# Altium PCB BTN7960_DRIVER.PcbDoc
Units mil, origin at the board's own origin, x right, y up, seen from the top; angles counter-clockwise.
Board outline 3013 x 3373 mil, 2 copper layers (Top Layer, Bottom Layer); 92 components, 54 nets, 281 pads, 201 vias.
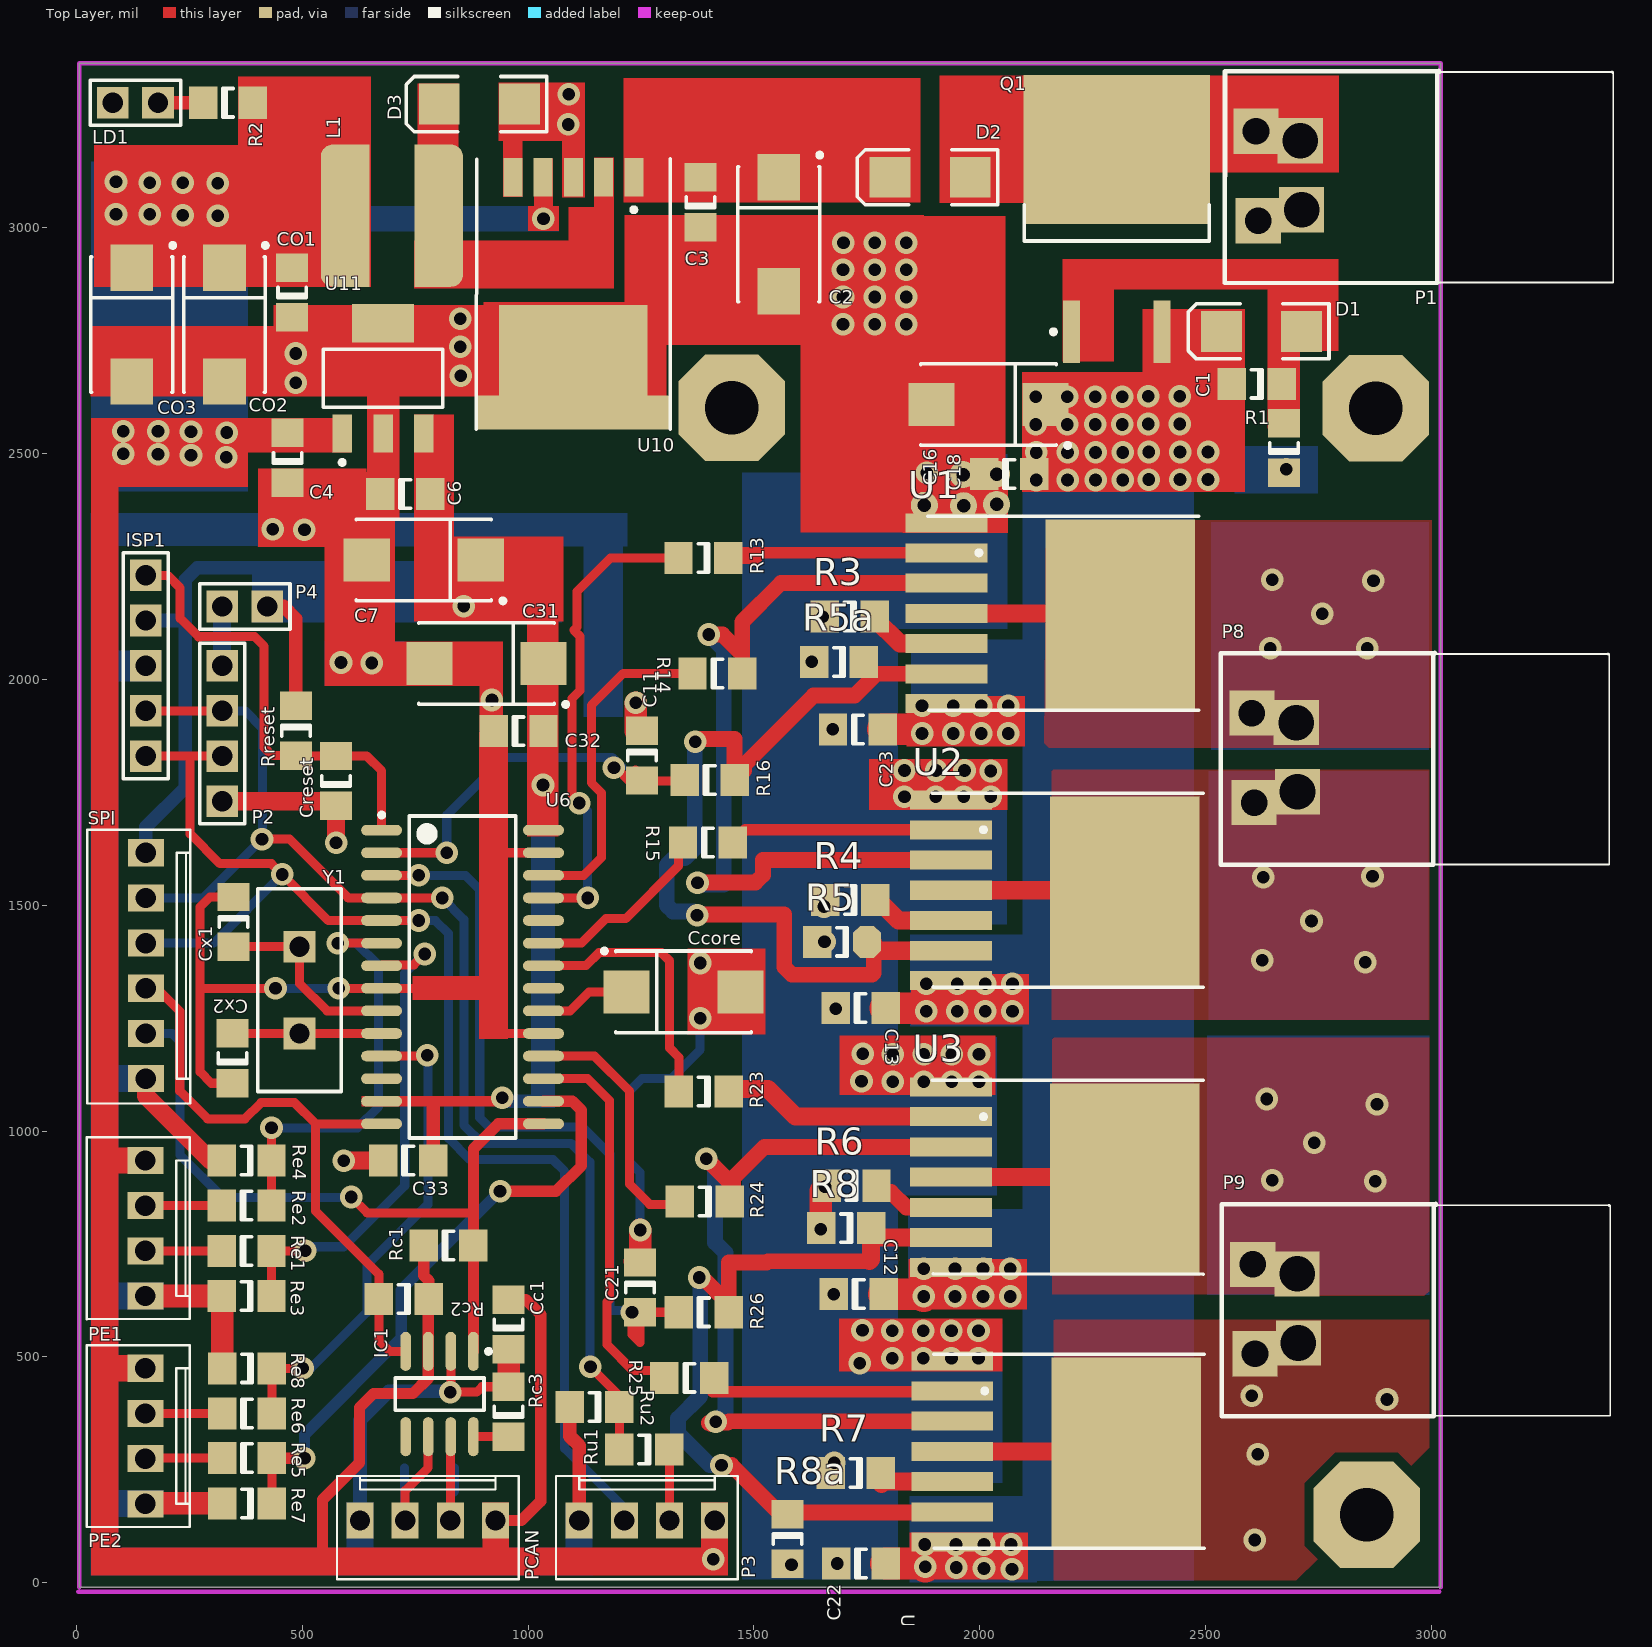
[diagram p0: Top Layer view]
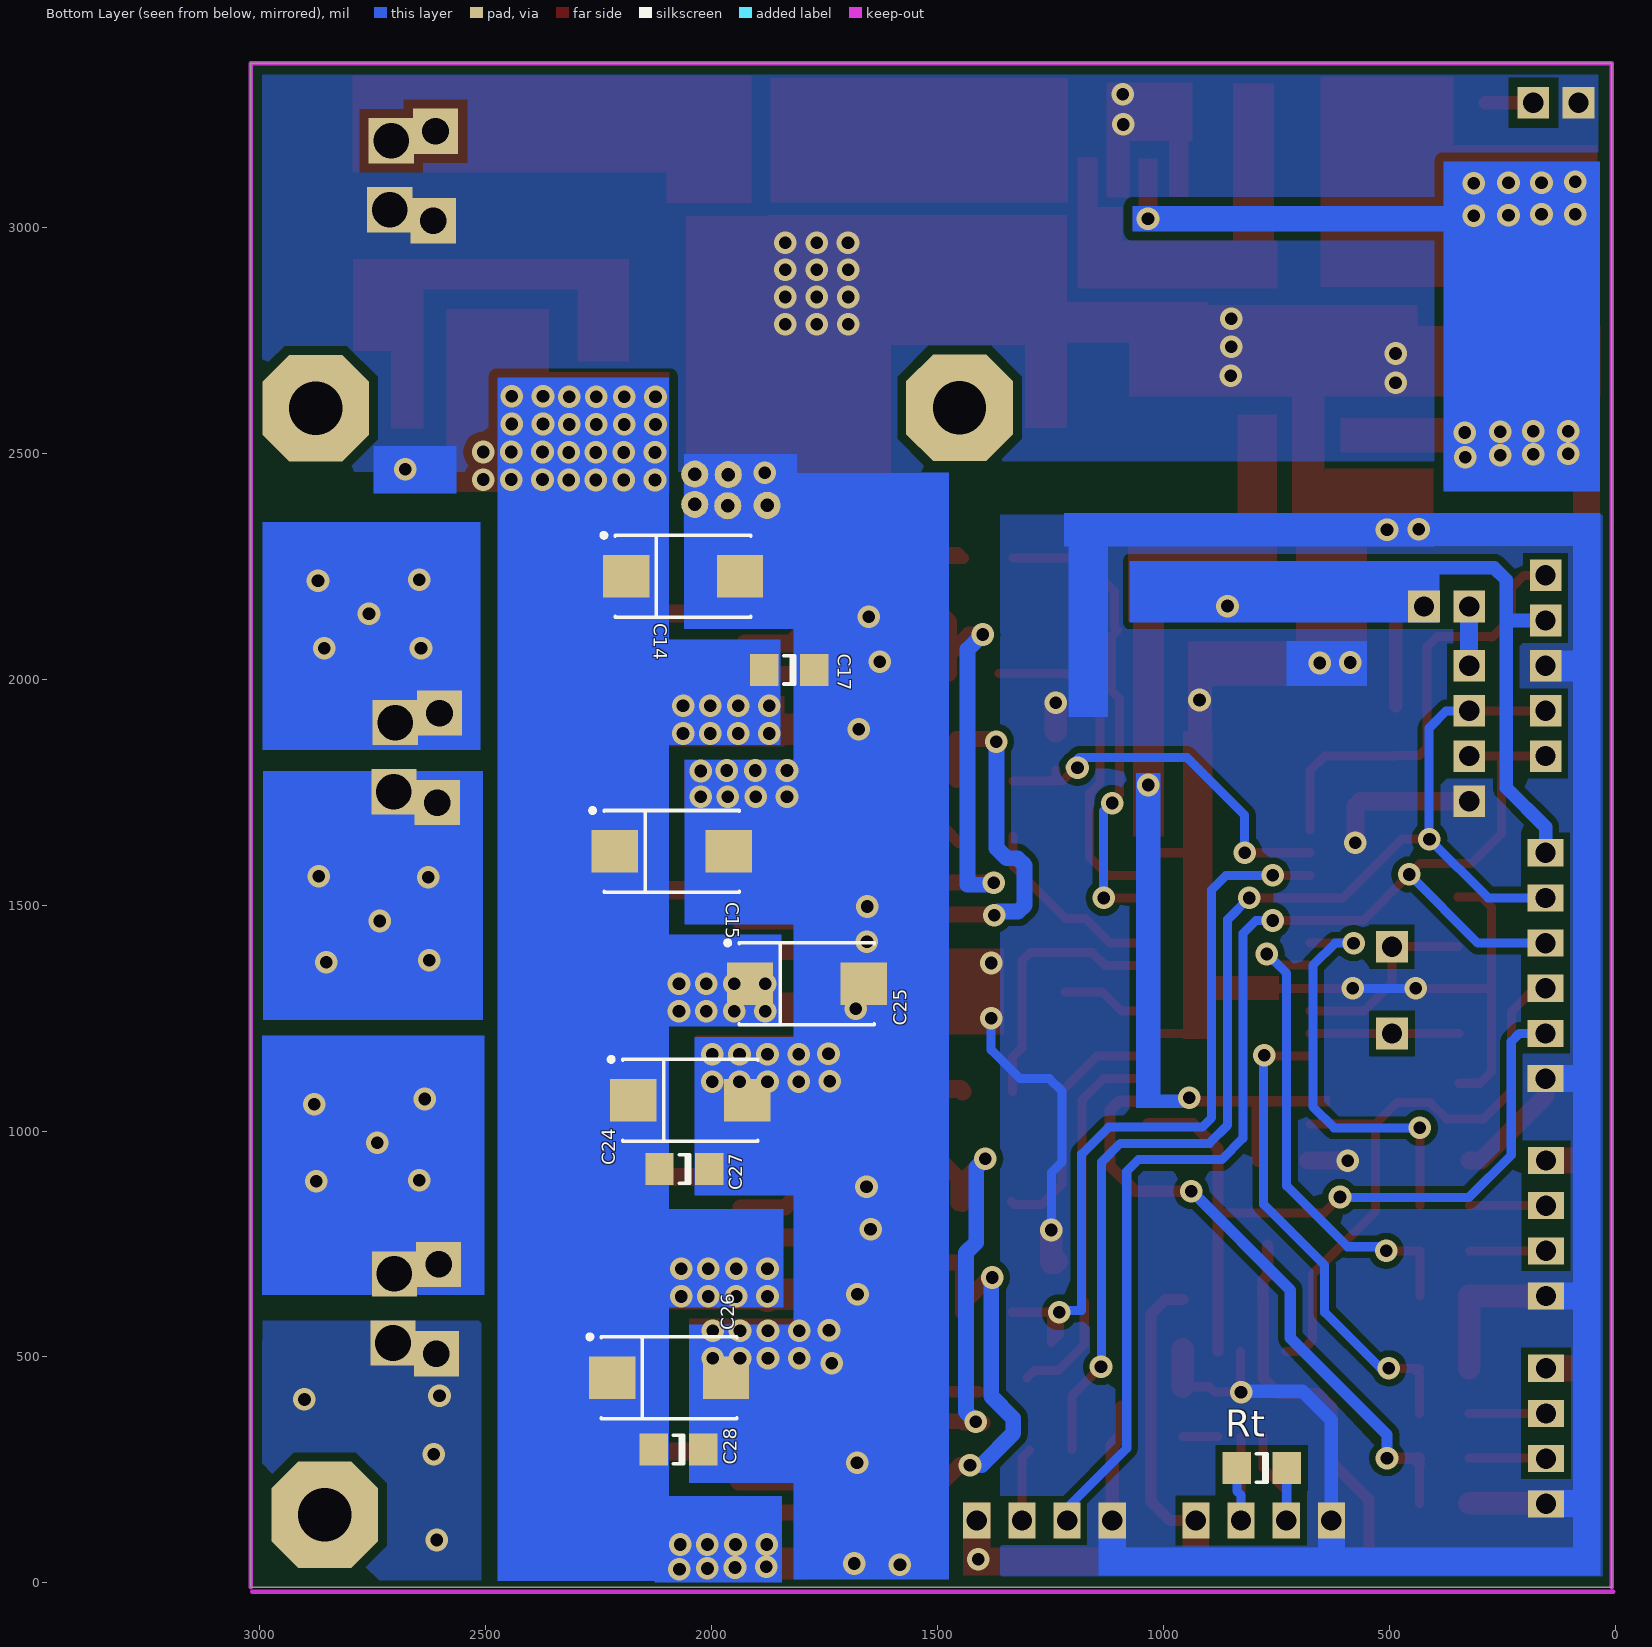
[diagram p1: Bottom Layer view, seen from below]

## Layer stack, top to bottom
Top Layer: signal copper 1.4
Dielectric: dielectric 12.6, FR-4, Dk 4.8
Bottom Layer: signal copper 1.4

## Board outline
7,-10 7,3363 3020,3363 3020,-10 7,-10

## Design rules (kind name [scope] priority, off if disabled: settings)
Clearance [All] p1: gap=15
HoleSize [All] p1: absolutevalues=TRUE maxlimit=300 minlimit=1 maxpercent=80.000 minpercent=20.000
PolygonConnect [All] p1: connectstyle=Direct reliefconductorwidth=40 reliefentries=4 polygonreliefangle="90 Angle" airgapwidth=10
RoutingVias [All] p1: holewidth=28 width=50 viastyle="Through Hole" minholewidth=28 minwidth=50 maxholewidth=28 maxwidth=50
SilkToSolderMaskClearance SilkscreenOverComponentPads [IsPad] p1: minsilkscreentomaskgap=10 clearancetoexposedcopper=TRUE
SolderMaskExpansion [All] p1: expansion=4
Width [All] p1: maxlimit=150 minlimit=10 preferedwidth=20
26 further rules are at their usual default settings.

## Components (designator, comment, footprint, x,y, rotation, side; value= is the part's Value field where it differs from the comment)
C1 "Cap" 1206#1 2613,2654 r180 top
C2 "Cap Pol1" TC7343-2917 1555,2985 r270 top
C3 "Cap" 1206#1 1382,3056 r90 top
C4 "Cap" 1206#1 468,2490 r90 top
C6 "Cap" 1206#1 728,2410 r0 top
C7 "ECAP" TC7343-2917 769,2264 r180 top
C11 "Cap" 1206#1 1252,1831 r270 top
C12 "Cap" 1206#1 1732,639 r0 top
C13 "Cap" 1206#1 1736,1272 r0 top
C14 "ZA MOST1" TC7343-2917 2063,2228 r180 bottom
C15 "ZA MOST1" TC7343-2917 2088,1619 r180 bottom
C16 "ZA MOST1" TC7343-2917 2019,2608 r180 top
C17 "Cap" 1206#1 1828,2021 r0 bottom
C18 "Cap" 1206#1 2065,2454 r0 top
C21 "Cap" 1206#1 1248,654 r270 top
C22 "Cap" 1206#1 1737,43 r0 top
C23 "Cap" 1206#1 1730,1889 r0 top
C24 "ZA MOST2" TC7343-2917 2047,1068 r180 bottom
C25 "ZA MOST2" TC7343-2917 1789,1326 r180 bottom
C26 "ZA MOST2" TC7343-2917 2094,454 r180 bottom
C27 "Cap" 1206#1 2060,916 r0 bottom
C28 "Cap" 1206#1 2073,295 r0 bottom
C31 "ZA MOST1" TC7343-2917 908,2035 r180 top
C32 "Cap" 1206#1 979,1885 r0 top
C33 "Cap" 1206#1 735,935 r0 top
Cc1 "Cap" 1206#1 957,572 r90 top
Ccore "ECAP" TC7343-2917 1344,1308 r0 top
CO1 "Cap" 1206#1 478,2856 r90 top
CO2 "Cap Pol1" TC7343-2917 328,2785 r270 top
CO3 "Cap Pol1" TC7343-2917 123,2785 r270 top
Creset "Cap" 1206#1 575,1775 r90 top
Cx1 "Cap" 1206#1 348,1463 r270 top
Cx2 "Cap" 1206#1 346,1161 r90 top
D1 "D Zener" DSO-C2/X2.3 2623,2770 r180 top
D2 "Diode 1N4007" DSO-C2/X2.3 1890,3111 r180 top
D3 "SB160" DSO-C2/X2.3 892,3273 r180 top
IC1 "MCP2551" R-8_N 804,418 r270 top
ISP1 "PROG" HDR1X5 154,2230 r270 top
L1 "Inductor" SDR0805 803,3026 r270 top
LD1 "LED1" RAD-0.1 131,3276 r180 top
P1 "POWER" KOMBINACIJA 2686,3114 r90 top
P2 "SERIAL3V" HDR1X4 323,2030 r270 top
P3 "SERIAL5V" BRXCON_4 1113,138 r0 top
P4 "POWER ON" HDR1X2 423,2161 r180 top
P8 "MOTOR1" KOMBINACIJA 2677,1826 r90 top
P9 "MOTOR2" KOMBINACIJA 2679,606 r90 top
PCAN "CAN" BRXCON_4 628,138 r0 top
PE1 "Encoder 1" BRXCON_4 153,935 r270 top
PE2 "Encoder 2" BRXCON_4 153,475 r270 top
Q1 "IRF9540" D2-PAK 2303,3015 r90 top
R1 "res" 1206#1 2673,2512 r90 top
R2 "res" 1206#1 336,3276 r0 top
R3 "res" 1206#1 1712,2139 r180 top
R4 "res" 1206#1 1713,1511 r180 top
R5 "res" 1206#2 1695,1419 r180 top
R5a "res" 1206#1 1688,2038 r180 top
R6 "res" 1206#1 1716,879 r180 top
R7 "res" 1206#1 1725,243 r180 top
R8 "res" 1206#1 1704,785 r180 top
R8a "res" 1206#1 1574,97 r270 top
R13 "res" 1206#1 1388,2268 r180 top
R14 "res" 1206#1 1419,2013 r0 top
R15 "res" 1206#1 1398,1639 r0 top
R16 "res" 1206#1 1402,1777 r0 top
R23 "res" 1206#1 1389,1088 r180 top
R24 "res" 1206#1 1391,844 r180 top
R25 "res" 1206#1 1357,454 r0 top
R26 "res" 1206#1 1389,599 r0 top
Rc1 "res" 1206#1 824,747 r0 top
Rc2 "res" 1206#1 725,628 r180 top
Rc3 "res" 1206#1 957,379 r90 top
Re1 "res" 1206#1 377,735 r0 top
Re2 "res" 1206#1 377,835 r0 top
Re3 "res" 1206#1 377,635 r180 top
Re4 "res" 1206#1 377,935 r180 top
Re5 "res" 1206#1 378,276 r0 top
Re6 "res" 1206#1 378,375 r0 top
Re7 "res" 1206#1 378,176 r180 top
Re8 "res" 1206#1 378,475 r180 top
Rreset "res" 1206#1 486,1886 r270 top
Rt "Res1" 1206#1 782,254 r0 bottom
Ru1 "res" 1206#1 1257,295 r180 top
Ru2 "res" 1206#1 1147,389 r180 top
SPI "SPI" BRXCON_6 159,1416 r270 top (schematic designator P_SPI_1)
U1 "Component_1" to263-7 2186,2146 r270 top
U2 "Component_1" to263-7 2196,1533 r270 top
U3 "Component_1" to263-7 2196,898 r270 top
U4 "Component_1" to263-7 2199,291 r270 top
U6 "DSPIC33FJ128MC802-I/SO" SOIC-SO28_N 855,1341 r0 top
U10 "LM2575HVT-5.0" TO-263(5) 1234,3111 r180 top
U11 "LM2937IMP-3.3" SOT223 679,2666 r0 top
Y1 "7.3234 MHz" HC-49U 494,1312 r270 top

## Footprints (in the part's own frame and the unit in brackets; to place one, negate y for a bottom-side part, rotate by r counter-clockwise, add the part's x,y. Pads: shape width x height; smd on the part's side, far side on the other; paste and mask are expansions set on the pad)
1206#1 [mm]
  rect 1.6x1.8 smd: 1(-1.4,0) 2(1.4,0)
  silkscreen extent -0.3,-0.8 0.3,0.8
1206#2 [mm]
  oct 1.6x1.8 smd: 1(-1.4,0)
  rect 1.6x1.8 smd: 2(1.4,0)
  silkscreen extent -0.3,-0.8 0.3,0.8
BRXCON_4 [mil]
  rect 60x80 hole 45: 1(0,0) 2(100,0) 3(200,0) 4(300,0)
  silkscreen extent -51,-130 351,98
BRXCON_6 [mil]
  rect 60x80 hole 45: 1(-200,-5) 2(-100,-5) 3(0,-5) 4(100,-5) 5(200,-5) 6(300,-5)
  silkscreen extent -251,-135 355,93
D2-PAK [mm]
  rect 3.5x0.95 smd: 1(-6.25,2.54) 3(-6.25,-2.54)
  rect 8.38x10.49 smd: 2(4.008,0)
  silkscreen extent -6.37,-5.21 0.89,5.21, body extent -1.14,-5.2 8.26,5.2, height 4.6
DSO-C2/X2.3 [mm] "DO-214-AA/SMB; 2 C-Bend Leads; Body 5.3 x 3.6 mm, inc. leads (LxW)"
  rect 2.3x2.3 smd: 1(-2.25,0) 2(2.25,0)
  silkscreen extent -3.8,-1.55 4.1,1.55
HC-49U [mil] "Quartz Crystal, Thru-Hole; 2 Leads; Body 11.35 x 4.65 x 13.46 mm (LxWxH max)"
  rect 70x70 hole 45: 1(-96.06,0) 2(96.06,0)
  silkscreen extent -224,-93 224,93
HDR1X2 [mil] "Connector; Header; 2 Position"
  rect 70x70 hole 45: 1(0,0) 2(100,0)
  silkscreen extent -50,-50 150,50
HDR1X4 [mil] "Connector; Header; 4 Position"
  rect 70x70 hole 45: 1(0,0) 2(100,0) 3(200,0) 4(300,0)
  silkscreen extent -50,-50 350,50
HDR1X5 [mil] "Connector; Header; 5 Position"
  rect 70x70 hole 45: 1(0,0) 2(100,0) 3(200,0) 4(300,0) 5(400,0)
  silkscreen extent -50,-50 450,50
KOMBINACIJA [mil]
  rect 100x100 hole 59.06: 1(-99,70) 2(99,75)
  rect 100x100 hole 78.74: 1(-75,-26) 2(78,-23)
  silkscreen extent -237,-716 233,144
R-8_N [mm]
  oval 2.2x0.6 smd: 1(-2.4,1.905) 2(-2.4,0.635) 3(-2.4,-0.635) 4(-2.4,-1.905) 5(2.4,-1.905) 6(2.4,-0.635) 7(2.4,0.635) 8(2.4,1.905)
  silkscreen extent -2.52,-2.5 0.9,2.88, body extent -1.95,-2.45 1.95,2.45, height 1.75
RAD-0.1 [mil]
  rect 70x70 hole 45: 1(-50,0) 2(50,0)
  silkscreen extent -100,-50 100,50
SDR0805 [mm]
  rrect50% 8x2.7 smd: 1(0,0) 2(0,-5.3)
  rect 8x1 smd: 1(0,-0.875) 2(0,-4.425)
SOIC-SO28_N [mm]
  oval 2.3x0.6 smd: 1(-4.55,8.255) 2(-4.55,6.985) 3(-4.55,5.715) 4(-4.55,4.445) 5(-4.55,3.175) 6(-4.55,1.905) 7(-4.55,0.635) 8(-4.55,-0.635) 9(-4.55,-1.905) 10(-4.55,-3.175) 11(-4.55,-4.445) 12(-4.55,-5.715) 13(-4.55,-6.985) 14(-4.55,-8.255) 15(4.55,-8.255) 16(4.55,-6.985) 17(4.55,-5.715) 18(4.55,-4.445) 19(4.55,-3.175) 20(4.55,-1.905) 21(4.55,-0.635) 22(4.55,0.635) 23(4.55,1.905) 24(4.55,3.175) 25(4.55,4.445) 26(4.55,5.715) 27(4.55,6.985) 28(4.55,8.255)
  silkscreen extent -4.67,-9.05 3,9.23, body extent -3.8,-9.06 3.8,9.06, height 2.65
SOT223 [mm] "SOT-223/SC-73; 4 Leads; Body 6.7 x 7.3 mm, inc. leads (LxW max)"
  rect 1.1x2.15 smd: 1(-2.3,-3.1) 2(0,-3.1) 3(2.3,-3.1)
  rect 3.5x2.15 smd: 4(0,3.1)
  silkscreen extent -3.35,-4.85 3.35,1.63
TC7343-2917 [mm]
  rect 2.6x2.4 smd: 1(-3.2,0) 2(3.2,0)
  silkscreen extent -4.57,-2.3 3.8,2.43
to263-7 [mm]
  rect 1.07x4.6 smd: 1(-5.08,-6.604) 2(-3.4,-6.608) 3(-1.7,-6.608) 4(0,-6.608) 5(1.7,-6.608) 6(3.4,-6.608) 7(5.08,-6.604)
  rect 10.8x8.4 smd: 4(0.127,3.175)
  silkscreen extent -5.46,-7.66 5.45,7.57
TO-263(5) [mm]
  rect 1.07x2.16 smd: 1(0,0) 2(1.7,0) 3(3.4,0) 4(5.1,0) 5(6.8,0)
  rect 8.33x6.99 smd: 3(3.4,10.675)
  rect 10.8x1.91 smd: 3(3.4,13.215)
  silkscreen extent -2.06,-1.05 8.85,14.18

## Part data
C1 C3 C4 C6 C11 C12 C13 C17 C18 C21 C22 C23 C27 C28 C32 C33 Cc1 CO1 Creset Cx1 Cx2: "Capacitor"
C2 CO2 CO3: "Polarized Capacitor (Radial)"
C7 C14 C15 C16 C24 C25 C26 C31 Ccore: library part "Cap Pol1", "Polarized Capacitor (Radial)"
D1: "Zener Diode"
D2: library part "Diode 1N914", "High Conductance Fast Diode"
D3: library part "D Schottky", "Schottky Diode"
ISP1: library part "Header 5", "Header, 5-Pin"
LD1: "Typical RED GaAs LED"
P1 P4 P8 P9: library part "Header 2", "Header, 2-Pin"
P2 P3 PCAN PE1 PE2: library part "Header 4", "Header, 4-Pin"
Q1: "HEXFET P-Channel Power MOSFET"
R1 R2 R3 R4 R5 R5a R6 R7 R8 R8a R13 R14 R15 R16 R23 R24 R25 R26 Rc1 Rc2 Rc3 Re1 Re2 Re3 Re4 Re5 Re6 Re7 Re8 Rreset Ru1 Ru2: library part Res1, "Resistor"
Rt: "Resistor"
SPI: library part "Header 6", "Header, 6-Pin"
U1 U2 U3 U4: "btn7960"
U6: "High-Performance 16-bit Digital Signal Controller, 128 KB Flash, 16 KB RAM, 28-Pin SOIC, Industrial Temperature"
U10: "SIMPLE SWITCHER 1A Step-Down Voltage Regulator"
U11: "500 mA Low-Dropout Regulator"
Y1: library part XTAL, "Crystal Oscillator"

## Free pads (board coordinates)
  oct 236.22x236.22 hole 118.11: 0(1451,2601) 2(2856,151) 3(2876,2600)
  round 60 hole 30: 0(2037,2454) 1(1963,2453) 2(1877,2385) 3(1964,2384) 4(2037,2387)

## Via types
v1: diameter 50, hole 28, Top Layer to Bottom Layer, 201 vias

## Nets (pads, with @x,y where several pads share a name; then routed paths per layer and width w, separated by ;. In a path a pad name is that pad's centre, name@x,y a point inside that pad or via, vN(x,y) a via of type N, cw(c..) or ccw(c..) an arc to the next point about the centre after c; other vN are vias at no path point)
+3.3V: C6.2 C7.1 C31.1 C32.2 C33.2 ISP1.2 P4.1 Rreset.1 SPI.1 U6.13 U6.28 U11.3 | length 1414.5
  Top Layer w30: P4.1 459,2161 486,2134 Rreset.1 ; C33.2 790.12,1062.12
  Bottom Layer w30: SPI.1 154,1673 241,1760 241,2133 ; ISP1.2 238,2130 241,2133 ; 401,2247 268,2247 241,2220 241,2133 ; v1@948,1081 948,1073 941,1066 1044,1066
  other v1: 943,1074 1033,1766 858,2162
+5V: C4.2 Cc1.2 CO1.2 CO2.1 CO3.1 IC1.3 L1.2 P3.4 PCAN.4 PE1.1 PE2.1 R2.2 Rc1.1 Rc2.1 U10.4 U11.1 | length 1473.6
  Top Layer w25: 545,42 545,184 627,266 627,388 658,419 745,419 779,453 IC1.3 779,626.88 Rc2.1 780.12,668.88 768.88,680.12 Rc1.1 ; PCAN.4 985,138 1028,181 1028,339.99 1027.89,340.11 1027.89,437.89 1028,438.01 1028,594 994.88,627.12 Cc1.2
  other v1: 1410,52 332,2491 254,2496 181,2498 104,2499 333,2546 254,2548 104,2549 181,2549 1034,3019 313,3026 236,3027 88,3029 163,3029 313,3098 163,3099 236,3099 88,3101
+24V: C1.2 C12.2 C13.2 C14.1 C15.1 C16.1 C17.2 C18.2 C22.2 C23.2 C24.1 C25.1 C26.1 C27.2 C28.2 D1.2 Q1.3 U1.7 U2.7 U3.7 U4.7 | length 431.2
  Top Layer w70: C23.2 1887,1889 1908,1910 ; C12.2 1872,639 v1@1876,635 ; C13.2 1885,1272 1903,1290 ; C22.2 1872,43 v1(1879,36)
  other v1: 2071,30 2009,32 1948,34 1878,85 1947,85 2009,85 2069,85 1876,634 1945,634 2007,634 2067,634 1876,695 1945,695 2007,695 2067,695 1881,1265 1950,1265 2012,1265 2072,1265 1881,1326 1950,1326 2012,1326 2072,1326 1872,1880 1941,1880 2003,1880 2063,1880 1872,1941 1941,1941 2003,1941 2063,1941 2125,2441 2194,2441 2256,2441 2316,2441 2374,2442 2443,2442 2505,2442 2125,2502 2194,2502 2256,2502 2316,2502 2374,2503 2443,2503 2505,2503 2124,2564 2193,2564 2255,2564 2315,2564 2373,2565 2442,2565 2124,2625 2193,2625 2255,2625 2315,2625 2373,2626 2442,2626
CAN_H: IC1.7 PCAN.3 Rt.2 | length 317.2
  Top Layer w20: PCAN.3 IC1.7@828,322.51
  Bottom Layer w20: PCAN.3@837.12,147.12 PCAN.3 828,194 837.12,203.12 Rt.2
CAN_L: IC1.6 PCAN.2 Rt.1 | length 321.5
  Top Layer w20: PCAN.2 728,204 779,255 IC1.6
  Bottom Layer w20: PCAN.2@726.88,139.12 Rt.1
CS1: C11.2 R16.1 U6.2 | length 874.9
  Top Layer w20: U6.2 v1(820,1616) ; v1@1197,1802 1223.12,1775.88 C11.2@1238,1775.88 ; C11.2@1238,1798.62 C11.2@1238,1775.88 ; C11.2@1238.12,1775 R16.1@1332.88,1775 ; C11.2@1238,1775.88 C11.2 1238,1774.88 C11.2@1238,1775.88
  Bottom Layer w20: v1(820,1616) 820,1699 948,1827 1186,1827 v1@1207.5,1805.5
  other v1: 1190,1804
CS2: C21.2 R26.1 U6.3 | length 1697.8
  Top Layer w20: U6.3 v1(758,1566) ; C21.2 1248,532 1230,550 v1(1230,599) 1248.12,599 R26.1
  Bottom Layer w20: v1(758,1566) 861,1566 893,1534 893,1030 914.09,1008.91 1121.09,1008.91 1181,949 1181,603 1226,603 v1(1230,599)
EA1: Re2.2 Re4.1 U6.6 | length 953.5
  Top Layer w20: Re2.2 Re4.1 v1(432.12,1007) ; v1@579,1404 591,1416 U6.6
  Bottom Layer w20: v1(432.12,1007) 622,1007 669,1054 669,1367 620,1416 v1(579,1416)
EA2: Re6.2 Re8.1 U6.11 | length 1087.4
  Top Layer w20: Re6.2 433.12,462 Re8.1@443.12,472 ; Re8.1 v1(501,475) ; U6.11 v1@778,1166
  Bottom Layer w20: v1(501,475) 519,475 643,599 643,703 778,838 v1@778,1166
  other v1: 777,1168
EB1: Re1.2 Re3.1 U6.7 | length 1110
  Top Layer w20: Re3.1 Re1.2 v1(507,735) ; U6.7 677.87,1368 747,1368 v1(771,1392)
  Bottom Layer w20: v1(507,735) 518,735 509,744 592,744 727,879 727,1349 v1@770.5,1392.5
EB2: Re5.2 Re7.1 U6.16 | length 1372
  Top Layer w20: Re7.1 433.12,263 Re5.2
  Top Layer w25: Re5.2@433.12,263 Re5.2@446.12,276 ; Re5.2 v1(505,276) ; v1@945,867 1062,867 1118,923 1118,1046 1098,1066 U6.16
  Bottom Layer w25: v1(505,276) 505,328 719,542 719,648 v1(938,867)
GND: C2.2 C3.1 C4.1 C6.1 C7.2 C11.1 C12.1 C13.1 C14.2 C15.2 C16.2 C17.1 C18.1 C21.1 C22.1 C23.1 C24.2 C25.2 C26.2 C27.1 C28.1 C31.2 C32.1 C33.1 Cc1.1 Ccore.2 CO1.1 CO2.2 CO3.2 Creset.1 Cx1.1 Cx2.1 D3.1 IC1.2 ISP1.3 LD1.2 P1.1 P2.4 P3.1 pad.0@2037,2454 pad.1 pad.2@1877,2385 pad.3@1964,2384 pad.4 PCAN.1 PE1.4 PE2.4 R1.1 R3.2 R4.2 R5.2 R5a.2 R6.2 R7.2 R8.2 R8a.2 Rc3.2 Re3.2 Re4.2 Re7.2 Re8.2 Ru2.2 SPI.6 U1.1 U2.1 U3.1 U4.1 U6.8 U6.19 U6.27 U10.3 U10.5 U11.2 U11.4 | length 4441.1
  Top Layer w20: Cx2.1 299.12,1105.88 274,1131 274,1316 ; Cx1.1 296.12,1518.12 274,1496 274,1316 ; v1(441,1316) 274,1316 ; v1(581,1316) U6.8 937,1316 ; IC1.2 829,422 886,422 898.12,434.12 Rc3.2 Rc3.2@954.88,432 ; 901,1216 U6.19 ; 936,1616 U6.27
  Top Layer w30: Ru2.2 1091.88,325.12 1113,304 P3.1
  Top Layer w40: SPI.6 154,1078 297,935 Re4.2 ; P2.4 Creset.1@564.88,1730 ; v1(575,1638) Creset.1 ; v1@593,935 C33.1
  Top Layer w50: PE1.4 322.88,635 Re8.2 ; PE2.4@154,176 Re7.2 ; Rc3.2 Cc1.1 ; C21.1@1236,712.12 C21.1@1239.12,709 ; C11.1@1238,1885.12 v1(1238,1948) ; C21.1 v1(1248,781) ; v1(1648,783) 1648,868 v1(1657,877)
  Bottom Layer w20: v1(441,1316) v1(581,1316) ; v1(1248,781) 1248,908 1224,932 1224,1088 1252,1116 1317,1116 1381,1180 v1(1381,1250)
  Bottom Layer w30: PCAN.1 628,360 692,424 822,424 v1@830,432
  other v1: 1583,40 1684,43 1677.88,266 828,422 1734,486 1806,497 1875,497 1937,497 1997,497 1806,558 1875,558 1937,558 1997,558 1740,559 1676.88,639 592,934 1807,1109 1876,1109 1938,1109 1998,1109 1738,1110 1807,1170 1876,1170 1938,1170 1998,1170 1741,1171 1681,1271 1381,1372 1656,1419 1655,1497 1833,1740 1902,1740 1964,1740 2024,1740 2024,1797 1833,1798 1903,1798 1966,1798 1674,1889 920,1954 654,2036 586,2037 1628,2039 1652,2138 505,2331 435,2332 1882,2457 2678,2465 486,2656 851,2672 486,2721 850,2736 1697,2786 1767,2786 1837,2786 850,2798 1697,2846 1767,2846 1837,2846 1697,2906 1767,2906 1837,2906 1698,2966 1767,2966 1837,2966 1089,3228 1090,3295
INA1: R13.2 U6.25 | length 1054.4
  Top Layer w20: U6.25 v1(1132,1516) ; v1@1109,1733 1097,1745 1097,1957.16 1115.17,1975.33 1115.17,2094.67 1101.13,2108.7 1108,2115.57 1108,2194 1182,2268 R13.2
  Bottom Layer w20: v1@1113,1727 1132,1708 v1(1132,1516)
  other v1: 1113,1726
INA2: R23.2 U6.22 | length 596
  Top Layer w20: U6.22 1128,1366 1157,1395 1295,1395 1313,1377 1313,1184 1333.88,1163.12 R23.2
INB1: R15.1 U6.23 | length 435.6
  Top Layer w20: U6.23 1118,1416 1172.12,1470.12 1216.12,1470.12 1332.88,1586.88 R15.1@1332.88,1653
INB2: R25.1 U6.17 | length 865.8
  Top Layer w20: U6.17 1132,1116 1180,1068 1180,626.78 1175,621.78 1175,527.22 1232.22,470 1285.88,470 R25.1
INH1: R14.1 U6.26 | length 744.3
  Top Layer w20: U6.26 1123,1566 1163,1606 1163,1748 1140,1771 1140,1942 1211,2013 R14.1
INH2: R24.2 U6.18 | length 560.8
  Top Layer w20: U6.18 1147,1166 1224,1089 1224,883 1269,838 1329.88,838 R24.2
NetC1_1: C1.1 D1.1 Q1.1 R1.2
NetC2_1: C2.1 C3.2 D2.2 U10.1
NetCcore_1: Ccore.1 U6.20 | length 201.3
  Top Layer w20: U6.20 1093,1266 1135,1308 Ccore.1
NetD3_2: D3.2 L1.1 U10.2 | length 2.7
  Top Layer w30: U10.2 U10.2@1169,3112.93
NetIC1_8: IC1.8 Rc3.1 | length 77.6
  Top Layer w20: IC1.8 Rc3.1@956.63,323.51
NetLD1_1: LD1.1 R2.1 | length 106.9
  Top Layer w30: LD1.1 R2.1@287.88,3276
NetP2_1: P2.1 P4.2 | length 131
  Bottom Layer w40: P2.1 P4.2
NetP3_3: P3.3 Ru1.1 | length 163
  Top Layer w20: Ru1.1@1296,294 1313,277 P3.3
NetPE1_2: PE1.2 Re2.1 | length 168.9
  Top Layer w20: PE1.2 Re2.1
NetPE1_3: PE1.3 Re1.1 | length 168.9
  Top Layer w20: PE1.3 Re1.1
NetPE2_2: PE2.2 Re6.1 | length 169.9
  Top Layer w20: PE2.2 Re6.1
NetPE2_3: PE2.3 Re5.1 | length 168.9
  Top Layer w20: PE2.3@154,276 Re5.1
NetR3_1: R3.1 U1.5 | length 186
  Top Layer w40: R3.1 1767.12,2134.88 1822.93,2079.07 U1.5
NetR4_1: R4.1 U2.5 | length 186.4
  Top Layer w40: R4.1 1774.54,1511 1819.47,1466.07 U2.5
NetR5_1: R5.1 R5a.1 R16.2 U1.6 U2.6 | length 2138.5
  Top Layer w35: v1(1370,1862) 1376.12,1868.12 1457.12,1868.12 R16.2 1478.12,1798 1478.12,1810.12 1632,1964 1723.12,1964 1771.26,2012.14 U1.6 ; v1(1374,1478) 1375,1479 1567,1479 1567,1363 1584,1346 1761,1346 1765.12,1350.12 1765.12,1402 R5.1@1767.98,1399.14 ; R5.1@1765.12,1420 1770,1401 U2.6@1937.89,1401
  Top Layer w40: R5.1@1767.98,1399.14 U2.6
  Bottom Layer w35: v1@1369,1841 1369,1626 1346.75,1603.75 1322.75,1603.75 1307,1588 1307,1500 1321,1486 1366,1486 v1(1374,1478)
NetR6_1: R6.1 U3.5 | length 179.8
  Top Layer w35: R6.1@1770.12,865 1803,865 1836.93,831.07 U3.5
NetR7_1: R7.1 U4.5 | length 158.8
  Top Layer w40: R7.1@1782.12,219 1787.19,224.07 U4.5
NetR8_1: R8.1 R8a.1 R26.2 U3.6 U4.6 | length 1804.3
  Top Layer w35: v1(1379,676) 1386,676 R26.2@1444.12,617.88 ; R26.2 R26.2@1444.12,617.88 ; v1@1450,261 R8a.1@1569.86,141.14 ; R8a.1@1571,156 U4.6@1944,156 ; 1755.24,712 1531,712 1528,709 1444.12,709 R26.2@1444.12,617.88
  Top Layer w40: 1755.24,712 1759.12,715.88 R8.1 1779.98,764.14 U3.6
  Bottom Layer w35: v1@1381,681 1381,413 1332,364 1332,331 1402,261 v1@1423,261
  other v1: 1428,260
NetR13_1: R13.1 U1.2 | length 550.5
  Top Layer w25: 1506,2268 R13.1 1454.98,2279.86 U1.2
NetR14_2: R14.2 U1.3 U2.3 | length 1922.6
  Top Layer w35: v1(1375,1550) 1503,1550 1519.87,1566.87 1519.87,1599.93 U2.3 ; v1(1400,2099) 1430,2099 1474.12,2054.88 ; R14.2 1474.12,2054.88 ; U1.3 1559.93,2212.93 1474.12,2127.12 1474.12,2054.88
  Bottom Layer w35: v1(1375,1550) 1380,1545 1433.12,1545 1433.12,2065.88 v1(1400,2099)
NetR15_2: R15.2 U2.2 | length 494.3
  Top Layer w25: R15.2 1480.98,1666.86 U2.2
NetR23_1: R23.1 U3.2 | length 519.1
  Top Layer w40: R23.1 1449.12,1093 1531,1093 1592.14,1031.86 U3.2
NetR24_1: R24.1 U3.3 U4.3 | length 1854.9
  Top Layer w35: v1(1394,939) 1446.12,886.88 R24.1 ; v1@1400,354 v1@1408,354 ; v1(1415,357) 1406,352 v1@1408,354 ; R24.1@1444.12,838 1454,841 1454,896 1522.93,964.93 U3.3 ; U4.3 1444.93,357.93 1442,355 1409,355 v1@1408,354
  Bottom Layer w35: v1(1394,939) 1414,919 1414,753.5 1437,730.5 1437,379 v1(1415,357)
NetR25_2: R25.2 U4.2 | length 522.6
  Top Layer w25: R25.2@1408,423 U4.2@1930.6,423
OSCI: Cx1.2 U6.9 Y1.1 | length 434
  Top Layer w20: Cx1.2@348.18,1408.06 Y1.1 494,1327 555,1266 U6.9
OSCO: Cx2.2 U6.10 Y1.2 | length 329.7
  Top Layer w20: Cx2.2@346.18,1215.94 Y1.2 494.06,1216 U6.10
OUTA1: P8.2 U1.4 | length 387.2
  Top Layer w40: U1.4@1925.86,2146 2306,2146 U1.4@2311,2141
  other v1: 2643,2069 2857,2069 2758,2145 2871,2218 2647,2220
OUTA2: P9.2 U3.4 | length 387.2
  Top Layer w40: U3.4@1935.86,898 2316,898 U3.4@2321,893
  other v1: 2875,889 2647,891 2740,974 2879,1059 2635,1071
OUTB1: P8.1 U2.4 | length 387.2
  Top Layer w40: U2.4@1935.86,1533 2316,1533 U2.4@2321,1528
  other v1: 2853,1374 2625,1378 2734,1465 2627,1562 2869,1564
OUTB2: P9.1 U4.4 | length 387.2
  Top Layer w40: U4.4@1938.86,291 2319,291 U4.4@2324,286
  other v1: 2608,95 2615,285 2901,406 2602,414
PGC/TX/SDO: ISP1.5 P2.3 P3.2 SPI.3 U6.5 | length 2938.8
  Top Layer w20: ISP1.5 252,1830 ; P2.3 252,1830 ; v1(758,1466) U6.5 558,1466 v1(456,1568) 432,1592 318,1592 252,1658 252,1830
  Bottom Layer w20: SPI.3@155,1415 SPI.3 304,1416 v1(456,1568) ; v1(758,1466) 795,1466 824,1437 824,984 871.18,936.82 1055.18,936.82 1081,911 1081,298 1213,166 P3.2
PGD/RX/CS: ISP1.4 P2.2 Ru1.2 Ru2.1 SPI.2 U6.4 | length 2791.7
  Top Layer w20: ISP1.4 P2.2 ; v1@412,1659 425,1646 472,1646 602,1516 U6.4 v1(810,1516) ; v1(1138,478) 1202.12,413.88 Ru2.1 1202.12,295.24 Ru1.2
  Bottom Layer w20: SPI.2 281,1516 v1(411,1646) ; P2.2 374,1930 412,1892 412,1659 v1@399,1646 ; v1(810,1516) 858,1468 858,1013 898,973 1095,973 1136.88,931.12 v1@1136.88,478
RESET: Creset.2 ISP1.1 Rreset.2 U6.1 | length 1003.6
  Top Layer w20: ISP1.1 202,2230 230,2202 230,2135 271,2094 274.57,2094 275.57,2095 394,2095 416,2073 416,1849 434.12,1830.88 Rreset.2 486.76,1830.12 Creset.2 642.88,1830.12 675.87,1797.13 U6.1
RX/SDA/SDI: IC1.4 Rc2.2 SPI.4 U6.14 | length 1409.4
  Top Layer w20: SPI.4 178,1316 229,1265 229,1089 291,1027 373,1027 409,1063 483,1063 530,1016 ; 669.88,561.12 669.88,583 ; Rc2.2@669.88,630 Rc2.2 ; U6.14 530,1016 ; IC1.4 694,512.49 669.88,536.61 669.88,583 ; 530,1016 530,823 669.88,683.12 Rc2.2 ; 669.88,583 Rc2.2
TX/SCL: IC1.1 Rc1.2 SPI.5 U6.15 | length 1663.3
  Top Layer w20: v1(609,854) 644,819 879,819
  Top Layer w25: IC1.1 879,819 879,961 934,1016 U6.15
  Bottom Layer w20: SPI.5 212,1216 230,1198 230,947 324,853 v1@609,853
VBAT: D2.1 P1.2 Q1.2 | length 386.8
  Top Layer w20: Q1.2@2322.2,3192 P1.2@2709,3192
pads on no net: IC1.5 U6.12 U6.21 U6.24

## Polygon pours and split planes (outlines as drawn)
OUTB2 on Bottom Layer "Bottom Layer-No Net" (solid, pour order 17): 2993,580 2509,580 2507,578 2510,575 2510,-7 2723,-7 2731,1 2998,268 2998,299
GND on Bottom Layer "Bottom Layer-No Net" (solid, pour order 5): 3012,3354.04 3007,3359 1479,3359 1479,2485.75 1485,2479.8 1506,2458.96 1526,2458.96 3007,2458.96 3012,2454
GND on Bottom Layer "GND" (solid, remove dead copper, pour order 4): 1506,3339 1506,2482 37,2482 37,2483 37,3340 1505,3340 1506,3339
GND on Bottom Layer "GND" (solid, remove dead copper, pour order 6): 27.35,2366.67 30.17,2363.67 1363.35,2363.67 1360.53,2363.67 1360.53,17.67 1357.71,14.67 27.35,14.67 27.35,2366.67
OUTB2 on Top Layer "Bottom Layer-No Net" (solid, pour order 15): 2681,582 2167,582 2158,591 2164,585 2164,4 2168,0 2695,0 3000,305 3000,582
OUTA2 on Top Layer "Bottom Layer-No Net" (solid, pour order 13): 2660,636 2657,639 2160,639 2160,1203 2164,1207 2997,1207 3001,1211 3001,640 3006,635
OUTB1 on Top Layer "Bottom Layer-No Net" (solid, pour order 9): 2678,1800 2162,1800 2158,1796 2159,1795 2159,1246 3001,1246 3002,1247 3002,1791 3011,1800
OUTA1 on Top Layer "Bottom Layer-No Net" (solid, pour order 7): 2147,2353 2148,2352 3001,2352 3001,1853 3005,1849 3004,1848 2142,1848

## Keep-outs
Keep-Out Layer:
  lines w10: 4,-20 3017,-20 ; 7,-10 7,3363 3020,3363 3020,-10

## Other copper
Top Layer:
  rectangle net GND: 1603,2325 2057,3025
  rectangle net +24V: 1844,8 2106,111
  rectangle net GND: 1688,468 2050,585
  rectangle net +24V: 1842,605 2104,717
  rectangle net GND: 1689,1080 2035,1212
  rectangle net +24V: 1847,1236 2109,1348
  rectangle net GND: 1754,1711 2061,1823
  rectangle net +24V: 1838,1851 2100,1963
  rectangle net GND: 1829,2324 2062,2466
  rectangle net GND: 744,1290 953,1343
  rectangle net GND: 1353,1214 1525,1404
  rectangle net GND: 891,1204 956,1884
  rectangle net +5V: 1383,16 1443,178
  rectangle net +5V: 42,906 192,964
  rectangle net +5V: 36,446 192,504
  rectangle net +5V: 1383,25 1443,178
  rectangle net +5V: 899,23 958,178
  rectangle net GND: 402,2293 642,2467
  rectangle net GND: 892,1852 945,2084
  rectangle net GND: 549,1985 945,2084
  rectangle net GND: 549,1985 706,2459
  rectangle net +3.3V: 748,2128 1078,2316
  rectangle net +3.3V: 748,2214 836,2586
  rectangle net +3.3V: 998,1652 1067,2304
  rectangle net +3.3V: 998,1652 1062,1791
  rectangle net +3.3V: 631,1054 962,1078
  rectangle net +5V: 33,16 1436,78
  rectangle net +5V: 33,16 93,2578
  rectangle net NetD3_2: 1090,2919 1190,3045
  rectangle net +5V: 1000,2992 1068,3047
  rectangle net +5V: 1013,2999 1055,3153
  rectangle net +5V: 39,2868 646,3183
  rectangle net +5V: 358,2868 652,3334
  rectangle net NetD3_2: 755,2866 846,3319
  rectangle net NetD3_2: 747,2865 1190,2971
  rectangle net NetD3_2: 1146,2901 1190,3155
  rectangle net GND: 901,2745 1288,2835
  rectangle net GND: 1213,2556 1306,2920
  rectangle net VBAT: 1911,3122 2795,3336
  rectangle net VBAT: 1911,3054 2100,3330
  rectangle net NetC2_1: 1211,3055 1869,3331
  rectangle net +24V: 2093,2415 2429,2680
  rectangle net NetC1_1: 2637,2555 2709,2914
  rectangle net NetC1_1: 2183,2863 2791,2930
  rectangle net NetC1_1: 2699,2727 2794,2930
  rectangle net NetC1_1: 2183,2703 2297,2930
  rectangle net GND: 1213,2740 1876,3028
  rectangle net GND: 1075,3066 1126,3283
  rectangle net GND: 935,3191 1126,3321
  rectangle net GND: 437,2626 1076,2828
  rectangle net GND: 944,3067 988,3285
  rectangle net GND: 944,3191 1047,3285
  rectangle net GND: 643,2357 715,2661
  rectangle net GND: 32,2626 564,2782
  rectangle net +5V: 37,2502 608,2578
  rectangle net +5V: 37,2426 380,2578
  rectangle net +24V: 2360,2415 2587,2819
Bottom Layer:
  rectangle net OUTA1: 2511,1843 2994,2348
  rectangle net OUTB1: 2506,1246 2993,1797
  rectangle net OUTA2: 2503,637 2995,1211
  rectangle net GND: 2564,2411 2748,2516
  rectangle net +24V: 1844,1 2126,192
  rectangle net GND: 1738,221 2050,572
  rectangle net +24V: 1841,610 2168,827
  rectangle net GND: 1123,1916 1210,2368
  rectangle net GND: 400,2294 1220,2368
  rectangle net +3.3V: 1006,1051 1060,1793
  rectangle net +3.3V: 389,2126 1075,2262
  rectangle net GND: 549,1985 727,2085
  region net GND: 34,1146 34,1086 194,1086 194,1146
  region net GND: 34,665 34,605 194,605 194,665
  region net GND: 33,206 33,146 193,146 193,206
  rectangle net GND: 598,18 658,178
  rectangle net GND: 1083,16 1143,176
  rectangle net GND: 32,16 1143,78
  rectangle net GND: 32,1995 189,2064
  rectangle net GND: 32,2295 547,2368
  rectangle net GND: 32,19 93,2368
  rectangle net +5V: 279,2991 1068,3047
  rectangle net +5V: 33,2416 380,3146
  rectangle net GND: 1474,8 1819,2458
  rectangle net +24V: 2094,4 2474,2668
  rectangle net GND: 1726,857 2038,1208
  rectangle net +24V: 1845,1232 2172,1435
  rectangle net GND: 1770,1457 2060,1821
  rectangle net +24V: 1847,1854 2163,2088
  rectangle net GND: 1811,2111 2061,2499